# Altium PCB Monarch.PcbDoc
Units mil, origin at the board's own origin, x right, y up, seen from the top; angles counter-clockwise.
Board outline 1253.86 x 505.75 mil, 2 copper layers (Top Layer, Bottom Layer); 28 components, 32 nets, 138 pads, 36 vias.
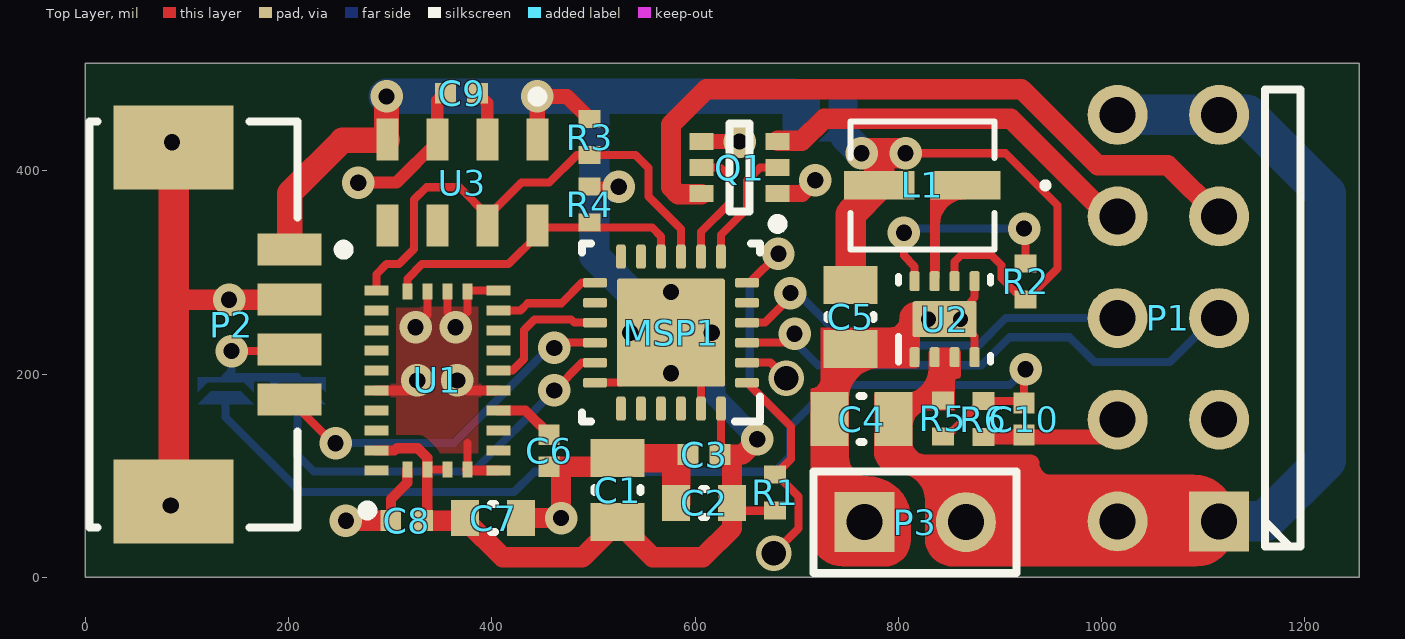
[diagram p0: Top Layer view]
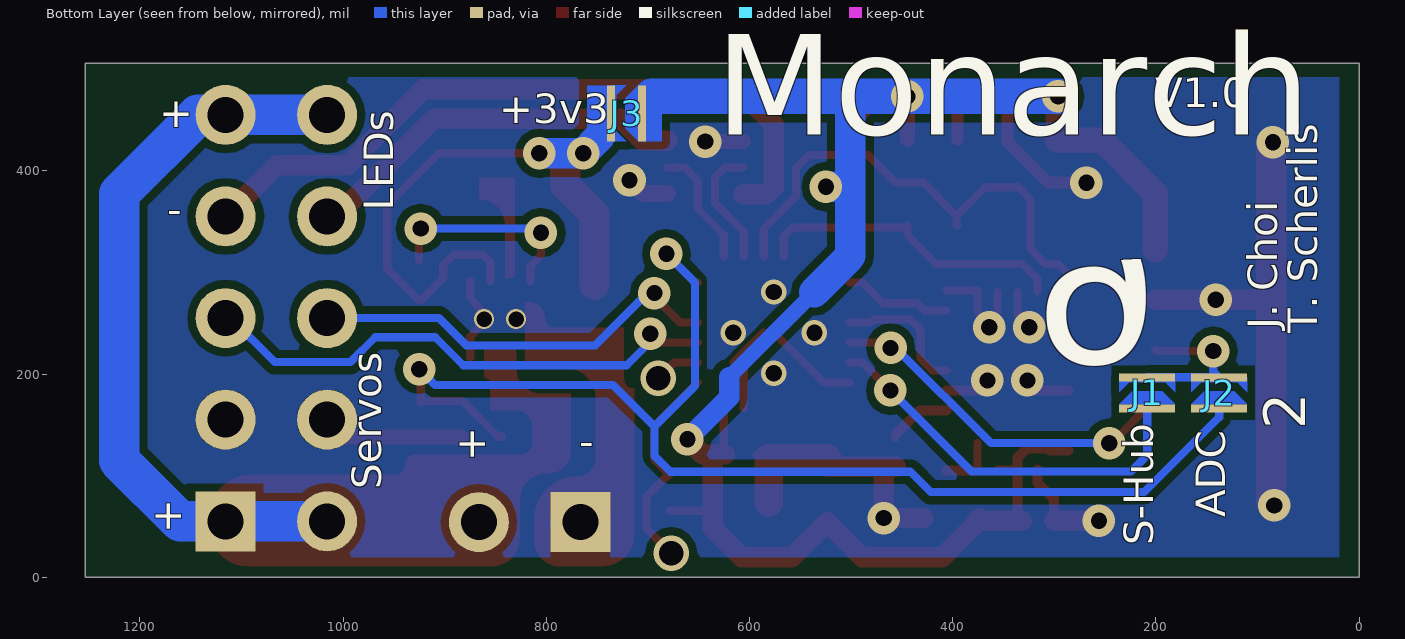
[diagram p1: Bottom Layer view, seen from below]

## Layer stack, top to bottom
Top Solder: solder mask 0.4, Solder Resist, Dk 3.5
Top Layer: signal copper 1.4
Dielectric 1: dielectric 12.6, FR-4, Dk 4.8
Bottom Layer: signal copper 1.4
Bottom Solder: solder mask 0.4, Solder Resist, Dk 3.5

## Board outline
1253.7,0 1253.7,505.75 -0.16,505.75 -0.16,0

## Design rules (kind name [scope] priority, off if disabled: settings)
Clearance [All] p1: gap=8 ignorepadtopadclearanceinfootprint=FALSE except(0: Arc-Hole Track-Hole SMDPad-Hole THPad-Hole Via-Hole Fill-Hole Poly-Hole Region-Hole Text-Hole)
HoleSize [All] p1: absolutevalues=TRUE maxlimit=100 minlimit=10 maxpercent=80.000 minpercent=20.000
MinimumSolderMaskSliver [All] p1: minsoldermaskwidth=3.94
PolygonConnect [IsVia vs InNet('GND')] p1: connectstyle=Direct reliefconductorwidth=10 reliefentries=4 polygonreliefangle="90 Angle" airgapwidth=10
RoutingVias [All] p1: holewidth=16 width=32 viastyle="Through Hole" minholewidth=16 minwidth=32 maxholewidth=28 maxwidth=50
SolderMaskExpansion [All] p1: expansion=1.97
Width [All] p1: maxlimit=50 minlimit=5 preferedwidth=8 minimp=50.000000 maximp=50.000000 favimp=50.000000
28 further rules are at their usual default settings.

## Components (designator, comment, footprint, x,y, rotation, side; value= is the part's Value field where it differs from the comment)
C1 "10uF" CAPC0805(2012)100_L 523.7,85.75 r90 top
C2 "2.2uF" CAPC0603(1608)100_L 608.7,73.25 r180 top
C3 "0.1uF" CAPC0402(1005)60_L 608.7,120.75 r180 top
C4 "10uF" CAPC0805(2012)100_L 763.7,155.75 r0 top
C5 "10uF" CAPC0805(2012)100_L 752.95,256.18 r90 top
C6 "0.1uF" CAPC0402(1005)60_L 456.2,124.58 r270 top
C7 "2.2uF" CAPC0603(1608)100_L 401.2,58.25 r180 top
C8 "0.1uF" CAPC0402(1005)60_L 316.2,55.75 r0 top
C9 "0.1uF" CAPC0402(1005)60_L 370.08,476.38 r0 top
C10 "0.1uF" CAPC0402(1005)60_L 923.7,155.75 r270 top
J1 "(Open)" "Solder Jumper" 208.66,196.85 r270 bottom
J2 "(Closed)" "Solder Jumper - Closed" 137.8,196.85 r270 bottom
J3 "(Open)" "Solder Jumper" 736.22,456.69 r180 bottom
L1 "IHLP-1212BZ" IHLP-1212BZ 823.7,385.75 r180 top
MSP1 "MSP430FR2433IRGER" RGE0024H 576.2,240.75 r180 top
P1 "Header 5X2H" HDR2X5H 1115.75,55.12 r90 top
P2 "53261-0471" MOLEX-53261-0471_V 143.7,248.62 r270 top
P3 "Header 2" HDR1X2 766.44,54.21 r0 top
Q1 "BSS138DW-7-F" DIOD-SOT363-6_V 643.7,403.25 r180 top
R1 "10K" RESC0402(1005)_L 678.7,83.25 r270 top
R2 "100K" RESC0402(1005)_L 925.2,291.34 r270 top
R3 "1K" RESC0402(1005)_L 496.2,433.25 r270 top
R4 "1K" RESC0402(1005)_L 496.2,366.74 r270 top
R5 "4K53 1%" RESC0402(1005)_L 843.7,156.06 r90 top
R6 "1K5 1%" RESC0402(1005)_L 883.7,155.75 r90 top
U1 "BNO055" BOSC-LGA-28_N 346.2,193.72 r90 top
U2 "TI-TPS62172DSG8" DSG0008A_V 845.45,254 r90 top
U3 "MPL3115A2" FRES-2153-01_V 370.81,388.43 r270 top

## Footprints (in the part's own frame and the unit in brackets; to place one, negate y for a bottom-side part, rotate by r counter-clockwise, add the part's x,y. Pads: shape width x height; smd on the part's side, far side on the other; paste and mask are expansions set on the pad)
BOSC-LGA-28_N [mm] "PQFN, 28-Leads, Body 5.20x3.80mm, Pitch 0.50mm, IPC Medium Density"
  rect 0.25x0.6 smd: 1(-2.25,1.525) 6(-2.25,-1.525) 7(-1.75,-1.525) 8(-1.25,-1.525) 9(-0.75,-1.525) 10(-0.25,-1.525) 11(0.25,-1.525) 12(0.75,-1.525) 13(1.25,-1.525) 14(1.75,-1.525) 15(2.25,-1.525) 20(2.25,1.525) 21(1.75,1.525) 22(1.25,1.525) 23(0.75,1.525) 24(0.25,1.525) 25(-0.25,1.525) 26(-0.75,1.525) 27(-1.25,1.525) 28(-1.75,1.525)
  rect 0.4x0.25 smd: 2(-2.225,0.75) 3(-2.225,0.25) 4(-2.225,-0.25) 5(-2.225,-0.75) 16(2.225,-0.75) 17(2.225,-0.25) 18(2.225,0.25) 19(2.225,0.75)
  silkscreen extent -3.37,1.63 -3.13,1.87, body extent -2.6,-1.9 2.6,1.9, height 1.18
CAPC0402(1005)60_L [mm] "Chip Capacitor, Body 1.0x0.5mm, Height 0.6mm, IPC High Density"
  rect 0.52x0.52 smd: 1(-0.4,0) 2(0.4,0)
  body extent -0.55,-0.3 0.55,0.3, height 0.6
CAPC0603(1608)100_L [mm] "Chip Capacitor, Body 1.6x0.8mm, Height 1.0mm, IPC High Density"
  rect 0.7x0.9 smd: 1(-0.7,0) 2(0.7,0)
  silkscreen extent -0.05,-0.35 0.05,0.35, body extent -0.87,-0.47 0.88,0.48, height 1
CAPC0805(2012)100_L [mm] "Chip Capacitor, Body 2.0x1.2mm, Height 1.0mm, IPC High Density"
  rect 0.95x1.35 smd: 1(-0.8,0) 2(0.8,0)
  silkscreen extent -0.05,-0.58 0.05,0.58, body extent -1.1,-0.72 1.1,0.72, height 1
DIOD-SOT363-6_V [mm] "SOT23, 6-Leads, Body 1.35x2.20mm, Pitch 0.65mm"
  rect 0.6x0.42 smd: 1(-0.95,0.65) 2(-0.95,0) 3(-0.95,-0.65) 4(0.95,-0.65) 5(0.95,0) 6(0.95,0.65)
  silkscreen extent -1.08,-1.1 0.25,1.53, body extent -1.1,-1.1 1.1,1.1, height 1.07
DSG0008A_V [mm] "SON, 8-Leads, Body 2x2mm, Pitch 0.5mm, Thermal Pad 1.6x0.9mm, TI Recommended"
  rrect40% 0.5x0.25 smd: 1(-0.95,0.75) 2(-0.95,0.25) 3(-0.95,-0.25) 4(-0.95,-0.75) 5(0.95,-0.75) 6(0.95,-0.25) 7(0.95,0.25) 8(0.95,0.75)
  rrect11% 0.9x1.6 smd paste-0.45: 9(0,0)
  silkscreen extent -1.07,-1.15 1.07,1.15, body extent -1.05,-1.05 1.05,1.05, height 0.8
FRES-2153-01_V [mm] "LGA, 8-Leads, Body 5x3mm, Pitch 1.25mm"
  rect 1.05x0.55 smd: 1(-1.075,1.875) 2(-1.075,0.625) 3(-1.075,-0.625) 4(-1.075,-1.875) 5(1.075,-1.875) 6(1.075,-0.625) 7(1.075,0.625) 8(1.075,1.875)
  silkscreen extent -2.27,1.75 -2.03,2, body extent -1.5,-2.5 1.5,2.5, height 1.2
HDR1X2 [mm] "Connector; Header; 2 Position"
  rect 1.5x1.5 hole 0.9: 1(0,0)
  round 1.5 hole 0.9: 2(2.54,0)
  silkscreen extent -1.27,-1.27 3.81,1.27
HDR2X5H [mm] "Connector; Header; 5x2 Position; Right Angle"
  rect 1.5x1.5 hole 0.9: 1(0,0)
  round 1.5 hole 0.9: 2(0,2.54) 3(2.54,0) 4(2.54,2.54) 5(5.08,0) 6(5.08,2.54) 7(7.62,0) 8(7.62,2.54) 9(10.16,0) 10(10.16,2.54)
  silkscreen extent -0.63,-2.03 10.79,-1.14, body extent -1.27,-12.19 11.43,2.86, height 5.59
IHLP-1212BZ [mil]
  rect 69x28 smd: 1(-42.5,0) 2(42.5,0)
  silkscreen extent -124,-63 71,63, body extent -71,-63 71,63, height 81
MOLEX-53261-0471_V [mm] "SMD, 4-Leads, Body 10.15x5.2mm, Pitch 1.25mm"
  rect 0.8x1.6 smd: 1(-1.875,1.45) 2(-0.625,1.45) 3(0.625,1.45) 4(1.875,1.45)
  rect 2.1x3 smd: MP1(-4.425,-1.45) MP2(4.425,-1.45)
  silkscreen extent -5.08,-3.55 5.08,2.93, body extent -5.07,-3.55 5.08,1.65, height 3.4
RESC0402(1005)_L [mm] "Chip Resistor, Body 1.0x0.5mm, IPC High Density"
  rect 0.45x0.55 smd: 1(-0.45,0) 2(0.45,0)
  body extent -0.52,-0.27 0.53,0.28, height 0.4
RGE0024H [mm]
  rrect42% 0.6x0.24 smd: 1(-1.9,1.25) 2(-1.9,0.75) 3(-1.9,0.25) 4(-1.9,-0.25) 5(-1.9,-0.75) 6(-1.9,-1.25) 13(1.9,-1.25) 14(1.9,-0.75) 15(1.9,-0.25) 16(1.9,0.25) 17(1.9,0.75) 18(1.9,1.25)
  rrect42% 0.24x0.6 smd: 7(-1.25,-1.9) 8(-0.75,-1.9) 9(-0.25,-1.9) 10(0.25,-1.9) 11(0.75,-1.9) 12(1.25,-1.9) 19(1.25,1.9) 20(0.75,1.9) 21(0.25,1.9) 22(-0.25,1.9) 23(-0.75,1.9) 24(-1.25,1.9)
  rrect50% 1.19x1.19 on Top Paste: 25(-0.695,0.695) 25(-0.695,-0.695) 25(0.695,0.695) 25(0.695,-0.695)
  rrect4% 2.7x2.7 smd paste-1.35: 25(0,0)
  silkscreen extent -2.22,-2.22 2.22,2.22, body extent -2.07,-2.07 2.07,2.07, height 1.01
"Solder Jumper" [mm]
  rect 0.2x1.4 smd paste+0: 1(0,0) 2(0.775,0)
  Top Layer region: 0.35,0.375 0.675,0.7 0.675,-0.7 0.35,-0.375
  Top Layer region: 0.375,-0.7 0,-0.7 0,0.7 0.375,0.7 0.125,0.45 0.125,-0.45
"Solder Jumper - Closed" [mm]
  rect 0.2x1.4 smd paste+0: 1(0,0) 2(0.775,0)
  Top Layer region: 0.375,-0.7 0,-0.7 0,0.7 0.375,0.7 0.125,0.45 0.125,-0.45
  Top Layer region: 0.35,0.375 0.675,0.7 0.675,-0.7 0.35,-0.375

## Part data
C1 C4 C5: library part CMP-1036-04928-1, "CAP 10uF 16V ±10% 0805 (2012 Metric) Thickness 1mm SMD"
C2 C7: library part CMP-1035-02763-1, "CAP 2.2uF 16V ±10% 0603 (1608 Metric) Thickness 1mm SMD"
C3 C6 C8 C9 C10: library part CMP-1034-02069-1, "CAP 100nF 16V ±10% 0402 (1005 Metric) Thickness 0.6mm SMD"
J1 J3: library part Jumper, "Jumper"
J2: library part "Jumper Closed", "Jumper"
L1: "IHLP-1212BZ / 2.2uH"
MSP1: "MSP430FR2433 16 MHz Ultra-Low-Power Microcontroller with 16 KB FRAM, 4 KB RAM, 19 IO, 4 Timers, RGE0024H (VQFN-24)"
P1: "Header, 5-Pin, Dual row, Right Angle"
P2: library part CMP-2000-05238-1, "Male Header, Pitch 1.25 mm, 1 x 4 Position, Height 3.4 mm, -40 to 85 degC, RoHS, Tape and Reel"
P3: "Header, 2-Pin"
Q1: library part CMP-2000-05966-2, "Dual N-Channel Enhancement Mode Field Effect Transistor, 50 V, 200 mA, -55 to 150 degC, 6-Pin SOT-363, RoHS, Tape and Reel"
R1: library part CMP-1011-00623-1, "10K 0.063W 1% 0402 (1005 Metric)  SMD"
R2: library part CMP-1011-00736-1, "100K 0.063W 1% 0402 (1005 Metric)  SMD"
R3 R4: library part CMP-1011-00510-1, "1K 0.063W 1% 0402 (1005 Metric)  SMD"
R5: library part CMP-1011-00584-1, "4K53 0.063W 1% 0402 (1005 Metric)  SMD"
R6: library part CMP-1011-00528-1, "1K5 0.063W 1% 0402 (1005 Metric)  SMD"
U1: library part CMP-2000-05075-1, "Intelligent 9-Axis Absolute Orientation Sensor, 1.7 V to 3.6 V, -40 to 85 degC, 28-Pin LGA, RoHS, Tape and Reel"
U2: library part TI-TPS62172DSG8-1600X900TP
U3: library part CMP-1261-00002-2, "Xtrinsic I2C Precision Altimeter, 1.95 to 3.6 V, -40 to 85 degC, 8-Pin LGA (2153-01), RoHS, Tray"

## Via types
v1: diameter 32, hole 16, Top Layer to Bottom Layer, tented both sides, 28 vias
v2: diameter 25, hole 16, Top Layer to Bottom Layer, tented both sides, 4 vias
v3: diameter 35, hole 24, Top Layer to Bottom Layer, 2 vias
v4: diameter 19.68, hole 15, Top Layer to Bottom Layer, 2 vias

## Nets (pads, with @x,y where several pads share a name; then routed paths per layer and width w, separated by ;. In a path a pad name is that pad's centre, name@x,y a point inside that pad or via, vN(x,y) a via of type N, cw(c..) or ccw(c..) an arc to the next point about the centre after c; other vN are vias at no path point)
+3.3V: C1.1 C2.1 C3.1 C7.2 C8.2 J3.2 MSP1.24 P2.1 R1.2 R3.1 R4.1 U1.3 U1.4 U1.28 U3.1 U3.4 | length 1897.7
  Top Layer w8: U1.3 U1.4 ; C3.1 625.41,121.71 MSP1.24 ; C2.1 643.98,65.53 R1.2
  Top Layer w10: U1.28 304.19,124.82 306.37,127 326.98,127 336.36,117.62 U1.3 C8.2@336.36,60.16 ; R4.1@501.2,384.41 v1(524.86,384.41)
  Top Layer w15: U3.1 v1(444.63,473.25) 473.92,473.25 R3.1
  Top Layer w20: C8.2 C7.2@373.64,55.75 ; C3.1 636.26,120.75 ; v1(661.2,135.75) 646.2,120.75 636.26,120.75 ; C7.2@373.64,55.75 C7.2@374.31,55.75 ; C7.2@373.64,55.75 C7.2@373.64,56.41 ; C7.2@373.64,56.41 C7.2@374.31,55.75 ; C7.2@373.64,56.41 C7.2 376.14,55.75 C7.2@374.31,55.75 ; C7.2@374.31,55.75 410.37,19.69 489.13,19.69 C1.1 558.27,19.69 607.64,19.69 636.26,48.31 C2.1 636.26,120.75
  Top Layer w25: P2.1 200.79,377.95 252.8,429.96 U3.4@296.2,429.96 ; v1(296.2,473.25) 296.2,430.75 U3.4
  Bottom Layer w15: 536.2,280.75 620,196.95
  Bottom Layer w20: 620,196.95 620,176.95 v1(661.2,135.75)
  Bottom Layer w30: 500.7,473.25 500.7,384.41 ; v1(524.86,384.41) 500.7,384.41 ; 536.2,280.75 500.7,316.25 500.7,384.41 ; J3.2@705.71,458.84 J3.2@705.71,467.47
  Bottom Layer w35: v1(296.2,473.25) v1(444.63,473.25) 500.7,473.25 696.4,473.25 J3.2@703.94,465.71
"A1 CS": MSP1.14
A1_RX: MSP1.16 P2.4 | length 362.2
  Top Layer w8: P2.4 243.56,132.03 v1(246.06,132.03) ; v1(461.2,225.75) 461.2,230.75 461.36,230.91 MSP1.16
  Bottom Layer w8: v1(246.06,132.03) 362.48,132.03 456.2,225.75 v1(461.2,225.75)
A1_TX: J1.2 MSP1.17 | length 394
  Top Layer w8: v1(461.36,183.88) 488.7,211.22 MSP1.17
  Bottom Layer w8: J1.2@208.66,170.28 208.66,119.97 224.6,104.03 381.51,104.03 v1(461.36,183.88)
ACLK: MSP1.11
B0_SCL: MSP1.10 R4.2 U1.19 U3.8 | length 313.7
  Top Layer w8: U1.19 316.67,293.72 331.2,308.25 416.24,308.25 444.63,336.64 U3.8 446.48,344.25 557.69,344.25 566.36,335.58 MSP1.10
B0_SDA: MSP1.9 R3.2 U1.20 U3.7 | length 500
  Top Layer w8: U1.20 286.16,298.21 296.2,308.25 308.57,308.25 323.37,323.05 323.37,371.74 335.49,383.86 368.09,383.86 U3.7@396.2,355.75 ; U3.7 396.2,346.89 U3.7@396.2,355.75 ; MSP1.9 586.04,342.83 554.2,374.68 554.2,402.75 541.42,415.53 R3.2 483.48,415.53 456.38,388.43 428.88,388.43 U3.7@396.2,355.75
BCL_RXD: MSP1.4 P1.6 | length 406
  Top Layer w8: MSP1.4 668.54,250.59 v1@693.7,275.75
  Bottom Layer w8: v1@693.7,275.75 704.57,275.75 752.07,228.25 878.82,228.25 905.69,255.12 P1.6
  other v1: 693.7,279.69
BCL_TXD: MSP1.3 P1.5 | length 512.5
  Top Layer w8: MSP1.3 689.02,230.91 v1@693.86,235.75
  Bottom Layer w8: v1@693.86,235.75 720.94,208.66 881.86,208.66 909.42,236.22 968.43,236.22 992.9,211.75 1067.37,211.75 P1.5@1110.75,255.12
  other v1: 697.8,239.69
GND: C1.2 C2.2 C3.2 C4.1 C5.1 C6.2 C7.1 C8.1 C9.1 C10.2 MSP1.18 MSP1.23 MSP1.25@576.2,240.75 P1.3 P1.4 P2.2 P2.MP1 P2.MP2 P3.1 Q1.1 Q1.4 R6.1 U1.2 U1.5 U1.6 U1.10 U1.15 U1.16 U1.17 U1.18 U1.25 U2.1 U2.4 U2.5 U2.9 U3.3 | length 1684.6
  Top Layer w8: 336.36,258.25 U1.18 ; 356.04,260.96 U1.17 ; U1.5 375.73,132.03 ; 375.73,260.96 U1.16 375.73,282.3 U1.15 ; MSP1.18 526.99,191.54 MSP1.25@576.2,240.75 ; MSP1.25@586.2,240.75 MSP1.25@615.73,211.22 ; C3.2@588.7,116.5 C3.2 ; MSP1.23 MSP1.25@605.73,211.22 ; U2.4 874.98,236.97 857.95,254 859.19,255.57 874.98,275.75 U2.5
  Top Layer w10: U1.25 v1@316.67,183.88 ; C8.1 300.45,76.85 316.67,93.07 U1.2 ; U1.5 376.71,105.14 U1.6 ; v1@376.71,183.88 U1.10
  Top Layer w12: v1(268.44,388.43) 305.96,388.43 346.2,428.67 U3.3 346.2,469.23 C9.1@353.35,476.38
  Top Layer w15: Q1.4 v1(643.7,428.84) ; R6.1 998.66,138.03 P1.4
  Top Layer w17: Q1.1 705.02,377.66 v1(718.2,390.84)
  Top Layer w20: 86.61,275.59 88.98,273.22 v1(141.2,273.22) P2.2 ; v1(256.2,55.75) C8.1 ; C7.1 v1(468.01,58.25) 468.01,108.27 467.45,108.83 ; C6.2 467.45,108.83 ; C1.2 523.7,108.83 467.45,108.83
  Top Layer w28: C1.2 581.14,117.24 C2.2
  Top Layer w30: P2.MP2 86.61,275.59 P2.MP1
  other v1: 83.7,70.75 326.52,193.72 365.89,193.72 324.8,246.06 364.17,246.06 84.95,428.25
  other v2: 576.2,200.75 536.2,240.75 616.2,240.75 576.2,280.75
  other v4: 829.7,254 861.2,254
IMU_INT: MSP1.13 U1.14 | length 106.5
  Top Layer w8: U1.14 428.07,262.62 435.2,269.75 468.53,269.75 488.74,289.96 MSP1.13
IMU_NRST: MSP1.15 U1.11 | length 134
  Top Layer w8: U1.11 420.26,203.56 431.48,214.79 431.48,243.37 441.86,253.75 477.8,253.75 480.96,250.59 MSP1.15
LED_IR: P1.7 Q1.6 | length 700.6
  Top Layer w20: Q1.6@606.3,376.98 583.01,376.98 576.2,383.79 576.2,445.67 610.92,480.38 921.19,480.38 996.06,405.51 1065.35,405.51 P1.7
LED_IR_SIG: MSP1.7 Q1.2 | length 121
  Top Layer w8: MSP1.7 625.41,337.1 651,362.69 651,390.55 663.7,403.25 Q1.2
LED_PWM: P1.8 Q1.3 | length 399.5
  Top Layer w20: Q1.3@681.1,429.52 705.11,429.52 726.91,451.32 910.65,451.32 1001.86,360.12 P1.8@1010.75,360.12 ; P1.8@1010.75,355.12 P1.8@1010.75,360.12 ; P1.8@1010.75,371.07 P1.8@1010.75,360.12 ; P1.8 P1.8@1010.75,360.12
LED_PWM_SIG: MSP1.8 Q1.5 | length 121.6
  Top Layer w8: MSP1.8 605.73,340.04 634.15,368.46 634.15,393.54 624.45,403.25 Q1.5
NetC5_2: C5.2 J3.1 L1.2 R2.2 U2.6 | length 640.4
  Top Layer w8: v1(807.09,417.32) 905.51,417.32 956.69,366.14 956.69,303.9 926.42,273.62 R2.2 ; U2.6 855.3,310.51 862.23,317.44 891.22,317.44 901.57,307.09 901.57,294.29 R2.2@922.99,272.88
  Top Layer w30: C5.2 752.95,357.5 L1.2 781.2,414.95 ; v1(763.78,417.32) v1(807.09,417.32)
  Bottom Layer w30: 748.16,432.94 v1(763.78,417.32) v1(807.09,417.32)
NetC6_1: C6.1 U1.9 | length 63.5
  Top Layer w8: C6.1@456.26,136.93 C6.1@456.26,140.69
  Top Layer w10: U1.9 432.76,164.19 C6.1@456.26,140.69
NetC9_2: C9.2 U3.2 | length 49.6
  Top Layer w12: C9.2 395.41,466.79 U3.2
NetJ1_1: J1.1 J2.1 P2.3 | length 156.7
  Top Layer w8: v1(143.7,222.59) 199.36,222.59 P2.3
  Bottom Layer w8: v1(143.7,222.59) 143.7,202.76 J2.1 J1.1
NetL1_1: L1.1 U2.7
NetR2_1: R2.1 U2.8 | length 204
  Top Layer w8: v1(805.41,339.12) 805.41,316.54 815.93,306.02 U2.8 ; v1(923.7,343.25) 923.7,341.84 925.2,340.34 R2.1@925.2,312
  Bottom Layer w8: v1@807.14,334.85 815.54,343.25 v1(923.7,343.25)
nRST: MSP1.1 R1.1 | length 212.5
  Top Layer w8: MSP1.1 694.2,148.34 694.2,116.46 R1.1 679.92,100.96 701.53,79.36 701.53,47.98 v3(677.17,23.62)
P1.6: MSP1.5
P1.7: C10.1 J2.2 MSP1.6 R5.1 R6.2 | length 1279.3
  Top Layer w8: MSP1.6 653.53,289.96 v1(681.89,318.32) v1@690.08,326.51 ; R5.1 847.36,138.35 882.48,173.46 R6.2 921.73,173.46 C10.1 923.7,203.23 v1(925.2,204.72)
  Bottom Layer w8: J2.2@137.79,170.28 J2.2 137.79,157.48 211.53,83.75 421.7,83.75 441.81,103.86 677.96,103.86 693.58,119.47 693.58,148.37 ; v1(681.89,318.32) 653.7,290.13 653.7,188.25 693.58,148.37 ; v1(925.2,204.72) 909.6,189.13 734.34,189.13 693.58,148.37
P2.0: MSP1.21
P2.1: MSP1.22
P2.7: MSP1.19
P3.0: MSP1.12
P3.2: MSP1.20
SBWTCK: MSP1.2 | length 45.2
  Top Layer w8: MSP1.2 674.29,211.22 v3(689.76,195.75)
VBATT: C4.2 P1.1 P1.2 P1.9 P1.10 P3.2 R5.2 U2.2 U2.3 | length 728.9
  Bottom Layer w40: P1.2 P1.1 1160.48,55.12 1220.47,115.11 1220.47,377.52 1142.88,455.12 P1.9 P1.10
pads on no net: MSP1.25@548.84,213.39 MSP1.25@548.84,268.11 MSP1.25@603.56,213.39 MSP1.25@603.56,268.11 U1.1 U1.7 U1.8 U1.12 U1.13 U1.21 U1.22 U1.23 U1.24 U1.26 U1.27 U3.5 U3.6

## Polygon pours and split planes (outlines as drawn)
GND on Top Layer "GND" (solid, remove dead copper, pour order 2): 389.45,266.1 300.45,266.1 300.45,121.92 389.45,121.92
GND on Bottom Layer "GND" (solid, remove dead copper, pour order 0): 19.69,492.13 1240.16,492.13 1240.16,19.69 19.69,19.69

## Other copper
Top Layer:
  region net NetL1_1: 831.14,295.75 831.14,393.25 866.2,393.25 866.2,372.12 ccw(c866.2,346.6) 840.67,346.59 840.67,293.72
  region net GND: 770.43,99.21 cw(c770.43,118.44) 751.2,118.44 751.2,176.16 cw(c780.79,176.16) 780.79,205.75 816.76,205.75 ccw(c816.76,209.78) 820.79,209.78 820.79,245.75 820.79,270.75 817.06,270.75 ccw(c817.06,254.89) 801.2,254.89 cw(c792.06,254.89) 792.06,245.75 723.7,245.75 723.7,195.75 cw(c713.7,195.75) 713.7,185.75 713.7,41.75 ccw(c744.7,41.75) 744.7,10.75 786.48,10.75 ccw(c786.48,36.33) 812.06,36.33 812.06,57.58 ccw(c770.44,57.58)
  region net VBATT: 829.64,164.19 855.3,164.19 855.3,192.34 cw(c858.7,192.34) 858.7,195.75 ccw(c858.7,198.25) 861.2,198.25 861.2,221.51 ccw(c856.96,221.51) 856.96,225.75 834.76,225.75 ccw(c834.76,220.63) 829.64,220.63 829.64,204.98 cw(c805.41,204.98) 805.41,180.75 776.2,180.75 776.2,123.25 ccw(c796.95,123.25) 796.95,102.5 799.45,102.5 cw(c799.45,75.75) 826.2,75.75 826.2,38.25 ccw(c853.7,38.25) 853.7,10.75 1093.7,10.75 ccw(c1093.7,48.25) 1131.2,48.25 1131.2,60.75 ccw(c1091.2,60.75) 1091.2,100.75 950.3,100.75 cw(c950.29,112.34) 938.7,112.34 ccw(c930.3,112.35) 930.3,120.75 826.2,120.75 cw(c826.2,133.25) 813.7,133.25 813.7,148.25 cw(c829.64,148.25)
  region: 768.7,305.7
Bottom Layer:
  region net +3.3V: 709.65,484.26 686.02,484.26 686.02,429.13 709.65,429.13
  rectangle net NetC5_2: 736.22,429.13 759.84,484.25
  region: 346.2,428.25

## Silkscreen, mask and mechanical layers (free items; w line width, h text height)
Bottom Overlay:
  text "V1.0" at 200.79,452.76 h50
  text "+3v3" at 846.46,437.01 h50
  text "+" at 1181.1,433.07 h50
  text "Monarch" at 633.86,403.25 h170
  text "LEDs" at 941,360.55 h50 r270
  text "-" at 1173.23,338.58 h50
  text "J. Choi" at 70.87,244.09 h50 r270
  text "T. Scherlis" at 31.5,240.16 h50 r270
  text "2" at 39.37,145.67 h70 r270
  text "6" at 186.81,119.4 h500 r356.8
  text "+" at 850.39,114.17 h50 r270
  text "-" at 767.72,110.24 h50
  text "Servos" at 952.76,86.61 h50 r270
  text "ADC" at 122.05,59.06 h50 r270
  text "+" at 1149.61,43.31 h50 r270
  text "S-Hub" at 192.91,31.5 h50 r270
Mechanical 1:
  lines w2: 0,0 1255.91,0 1255.91,507.87 0,507.87 0,0